# Altium PCB DAC_PCB.PcbDoc (part 2 of 2)
Units mil, origin at the board's own origin, x right, y up, seen from the top; angles counter-clockwise.
Board outline 5600 x 4000 mil, 4 copper layers (Top Layer, Plane(Gnd), Plane(Power), Bottom Layer), stack 23.756 mil thick; 217 components, 206 nets, 575 pads, 152 vias.
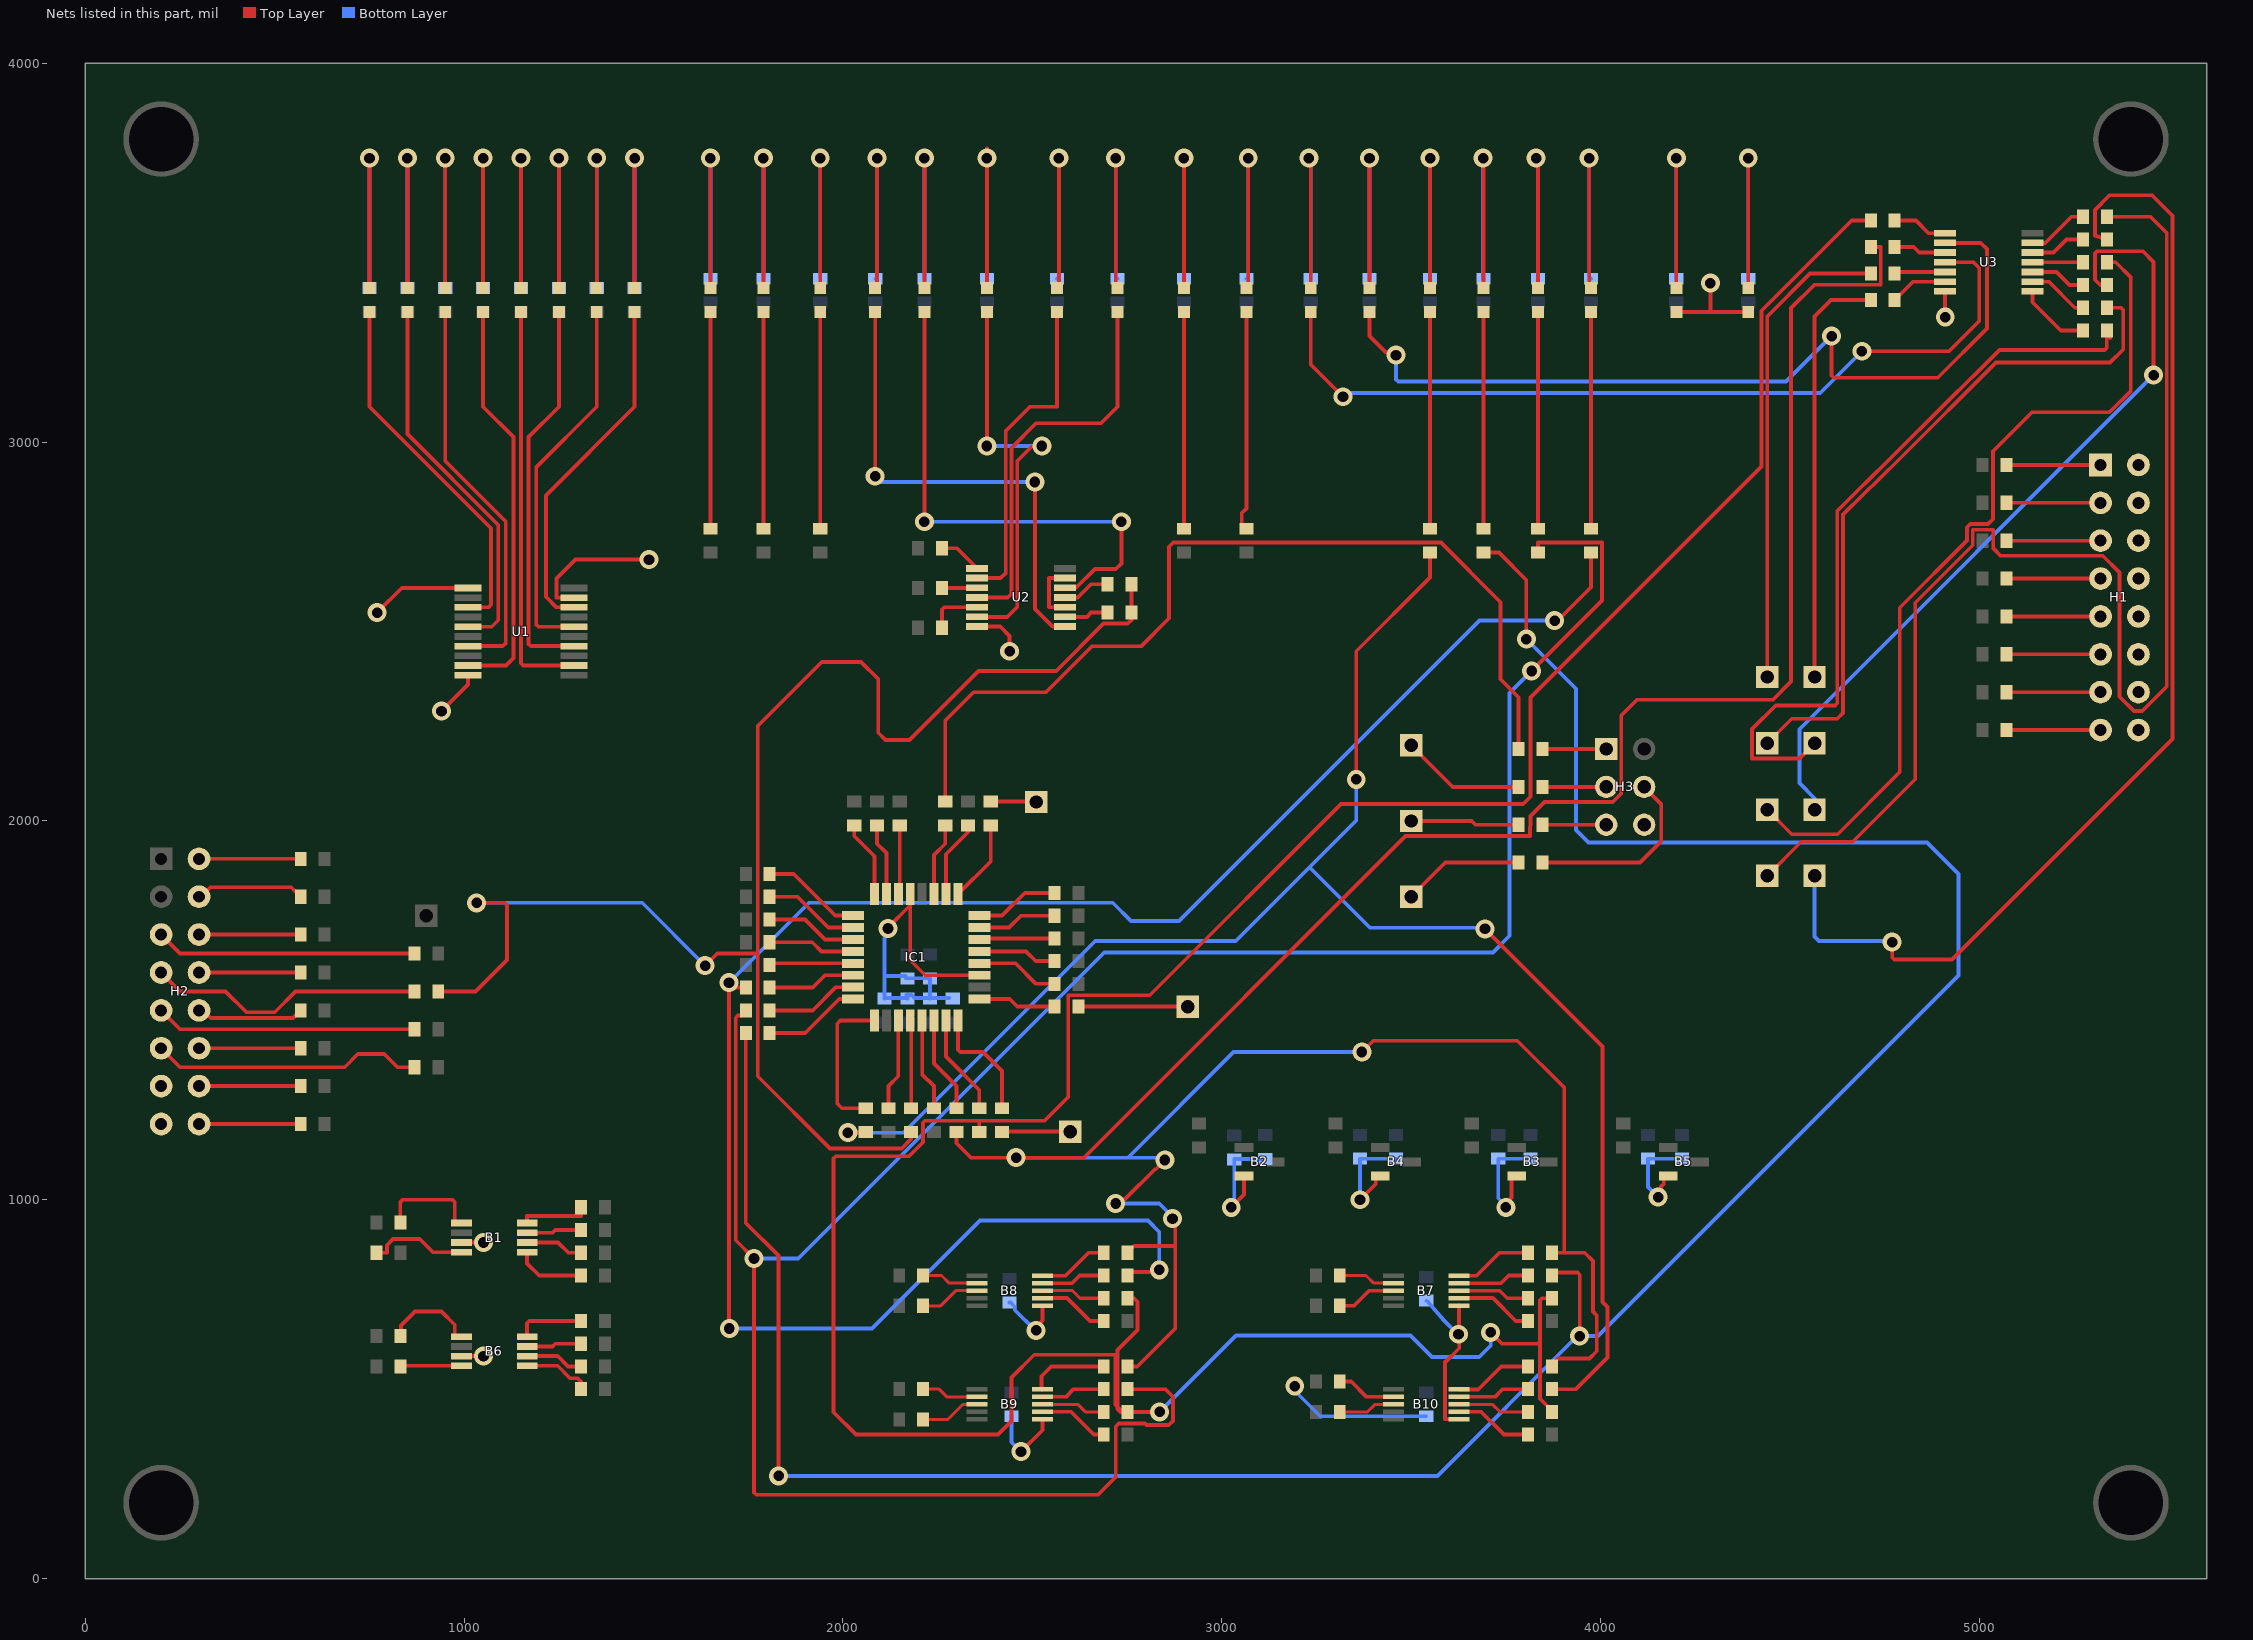
[diagram p4: the nets of this part, all layers, seen from the top]

## Via types
v1: diameter 50, hole 28, Top Layer to Bottom Layer, 152 vias

## Nets (pads, with @x,y where several pads share a name; then routed paths per layer and width w, separated by ;. In a path a pad name is that pad's centre, name@x,y a point inside that pad or via, vN(x,y) a via of type N, cw(c..) or ccw(c..) an arc to the next point about the centre after c; other vN are vias at no path point) (continued)
CPU_RnW: R69.1 R70.1 R108.2 R140.2 | length 4156
  Top Layer w10: R108.2@931.5,1550 1030,1550 1113,1633 1113,1778.14 1107.14,1784 v1(1033,1784) ; v1(1636,1618) 1668,1650 1775,1650 ; R140.2@2180,1178.5 2180,1160 2155,1135 1966,1135 1775,1326 1775,1650 ; R70.1@2761.5,2625 R69.1@2761.5,2550 2761.5,2530.5 2752,2521 2688,2521 2563,2396 2358,2396 2176,2214 2112,2214 2093,2233 2093,2375 2048,2420 1944,2420 1775,2251 1775,1650
  Bottom Layer w10: v1(1033,1784) 1470,1784 v1(1636,1618)
DAC_CS_0: R33.1 R95.1 R132.1 | length 5258.2
  Top Layer w10: v1(1700,660) 1699,661 v1(1699,1573) 1712,1560 R132.1@1743.5,1560 ; R33.1@2751.5,800 2760.7,809.21 2829.21,809.21 v1(2835,815) ; v1(3879,2529) 3887,2529 3975,2617 R95.1@3975,2708.5
  Bottom Layer w10: v1(1699,1573) 1910,1784 2712,1784 2760,1736 2887.21,1736 3680.21,2529 v1(3879,2529) ; v1(1700,660) 2077,660 2362,945 2805,945 2835,915 v1(2835,815)
DAC_CS_1: R43.1 R96.1 R134.1 | length 6454.5
  Top Layer w10: R134.1@1743.5,1500 1743.5,1497.05 1732.76,1486.3 1722.86,1486.3 1717,1480.44 1717,893 v1(1765,845) 1765,226.86 1770.86,221 2673,221 2720,268 2720,401 2728,409 2797,409 2801,405 2860,405 2871,416 2871,480 2851,500 R43.1@2751.5,500 ; v1(3818,2396) 4004,2582 4004,2735 3835,2735 R96.1@3835,2708.5
  Bottom Layer w10: v1(1765,845) 1882,845 2690,1653 3716,1653 3760,1697 3760,2338 v1(3818,2396)
DAC_CS_2: R34.1 R97.1 R136.1 | length 7292.1
  Top Layer w10: R136.1@1743.5,1440 1743.5,939 1830,852.5 v1(1830,271) ; R97.1@3691,2708.5 3732,2708.5 3804,2636.5 v1(3804,2480) ; R34.1@3871.5,800 3879.54,808.05 3939.14,808.05 3945,802.19 v1(3945,640)
  Bottom Layer w10: v1(1830,271) 3569.63,271 3938.63,640 3993,640 4945,1592 4945,1860 4862,1943 3968,1943 3935,1976 3935,2349 v1(3804,2480)
DAC_CS_3: R47.1 R98.1 R138.1 | length 4496.7
  Top Layer w10: v1(2013,1177) 2014.5,1178.5 R138.1@2060,1178.5 ; v1(3355,2110) 3355,2448 3550,2643 R98.1@3550,2708.5 ; v1(3695,1715) 4005,1405 4005,730 4018.33,716.67 4018.33,583.33 3935,500 R47.1@3871.5,500
  Bottom Layer w10: v1(2013,1177) 2160,1177 2666,1683 3037,1683 3232,1878 ; v1(3355,2110) 3355,2001 3232,1878 ; v1(3695,1715) 3691.72,1718.28 3391.72,1718.28 3232,1878
DAC_Din: R29.1 R31.1 R40.1 R44.1 R82.1 R135.2 | length 8119.6
  Top Layer w10: R135.2@2362.99,1189.25 2373.7,1189.25 R135.2@2360,1178.5 2360,1206.79 2358,1208.79 ; R29.1@2751.5,740 2768,740 2777.25,730.75 2777.25,656 2725,603.75 2725,453 ; v1(2836,440) R40.1@2751.5,440 R40.1@2738,440 ; v1(3710,650) 3740,620 3834.25,620 ; 3834.14,620 3840,625.86 ; R44.1@3871.5,440 3871.5,442.95 3840,474.45 3840,625.86 ; R31.1@3871.5,740 3845.86,740 3840,734.14 3840,625.86 ; R82.1@4713.5,3585 4663,3585 4425,3347 4425,2936 3815,2326 3815,2064 3796,2045 3315,2045 2810,1540 2595,1540 2595,1272 2531.79,1208.79 2358,1208.79 ; 2358,1208.79 2216.86,1208.79 2213.93,1205.86 2211,1202.93 2211,1152 2174,1115 1980.86,1115 1975,1109.14 1975,439 2034,380 2409,380 2445,416 2445,531 2505,591 2719,591 2719,459 2725,453 ; 2725,453 2725,448 2733,440 R40.1@2738,440 ; 2725,453 R40.1@2738,440
  Bottom Layer w10: v1(2836,440) 3038,642 3498,642 3555,585 3680,585 3710,615 v1(3710,650)
DAC_SCLK: R35.1 R36.1 R46.1 R48.1 R83.1 R137.2 | length 7898.4
  Top Layer w10: R137.2@2300,1178.5 2300,1149 2320,1129 2338,1111 2636,1111 3485,1960 3814,1960 3815,2013 3852,2050 4032,2050 4054.53,2072.53 4054.53,2278.53 4096,2320 4455,2320 4503,2368 4503,3354 4564.7,3415.7 4740,3415.7 4740,3515 R83.1@4713.5,3515 ; v1(2720,990) 2730.82,990 2742.51,1001.68 2744.89,1001.68 2823.8,1080.59 2825.59,1080.59 v1(2850,1105) ; R46.1@2751.5,560 2777,560 2877.03,660.03 2877.03,872.11 ; R35.1@2751.5,860 2751.5,862.95 2762.24,873.7 2765.2,873.7 2769.47,877.97 2871.17,877.97 2877.03,872.11 ; v1(2870,950) 2877.03,942.97 2877.03,872.11 ; v1(3370,1390) 3400,1420 3780,1420 3904,1296 3904,860 ; R48.1@3871.5,560 3882.24,570.75 3882.24,575.13 3888.1,580.99 3970.99,580.99 3990.14,600.14 3990.14,694.86 3980,705 3980,838.38 3958.38,860 3904,860 ; R36.1@3871.5,860 3904,860
  Bottom Layer w10: v1(2457,1111) 2752.28,1111 ; v1(2720,990) 2835,990 2870,955 v1(2870,950) ; v1(2850,1105) 2844,1111 2752.28,1111 ; v1(3370,1390) 3031.28,1390 2752.28,1111
GND: B1.3 B2.2 B3.2 B4.2 B5.2 B6.3 B7.6 B8.6 B9.6 B10.6 C1.1 C2.1 C3.1 C4.1 C5.1 C6.1 C7.1 C8.1 C9.1 C10.1 C11.1 C12.1 C13.2 C14.2 C15.2 C16.2 C17.2 C18.2 H1.2 H1.4 H1.6 H1.8 H1.10 H1.12 H1.14 H1.16 H2.13 H2.15 H3.6 IC1.19 IC1.29 LED16.1 LED17.1 U1.1 U1.10 U1.19 U2.7 U3.7 | length 4812
  Top Layer w10: v1(770,2550) 835.16,2615.16 U1.1@1010.24,2615.16 ; v1(940,2290) 1010.24,2360.24 U1.10@1010.24,2384.84 ; B6.3@993.39,587.2 v1(1050.95,587.2) ; B1.3@993.39,887.2 v1(1050.95,887.2) ; U1.19@1289.76,2589.57 1244,2589.57 1244,2640 1294,2690 v1(1488,2690) ; v1(2119,1716) 2119,1719 2177.57,1777.57 ; IC1.29@2177.57,1806.85 2177.57,1777.57 ; U2.7@2354.33,2513.23 2415.19,2513.23 2439.94,2488.48 v1(2439.94,2448) ; IC1.19@2360.17,1592.76 2217.24,1592.76 2177.57,1632.43 2177.57,1777.57 ; v1(2470,335) 2526.61,391.61 B9.6@2526.61,420.63 ; v1(2510,655) 2510,664.24 2526.61,680.86 B8.6@2526.61,720.63 ; v1(3025,980) 3058.66,1013.66 B2.2@3058.66,1062.6 ; v1(3365,1000) 3406.64,1041.64 3406.64,1055.79 3413.46,1062.6 B4.2@3418.66,1062.6 ; v1(3625,645) 3626.61,646.61 B7.6@3626.61,720.63 ; B10.6@3626.61,420.63 3589,420.63 3589,572 3591,572 3627,608 v1@3627,635 ; v1@3754,967 3754,994.82 3765,1005.82 3765,1055.79 3771.81,1062.6 B3.2@3778.66,1062.6 ; v1(4152,1007) 4159.65,1014.65 4159.65,1034.65 4166.64,1041.64 4166.64,1055.79 4173.46,1062.6 B5.2@4178.66,1062.6 ; LED17.1@4200,3343.5 4290,3343.5 ; v1(4290,3420) 4290,3343.5 ; LED16.1@4390,3343.5 4290,3343.5 ; U3.7@4909.33,3398.23 4909.33,3330.67 v1(4910,3330)
  Bottom Layer w10: C17.2@2110,1531.5 C17.2@2110,1532.99 ; v1(2119,1716) 2111.35,1708.35 2111.35,1691.49 2110,1690.14 2110,1595 ; C16.2@2165.61,1584.5 2165.61,1590.39 2114.61,1590.39 2110,1595 ; C18.2@2167.59,1540.27 2181.73,1540.27 2189.01,1532.99 C13.2@2230,1532.99 ; C18.2@2170,1531.5 2170,1532.99 C17.2@2110,1532.99 ; C16.2@2170,1584.5 C15.2@2230,1584.5 C13.2@2230,1532.99 ; C13.2@2230,1531.5 C13.2@2230,1532.99 ; C14.2@2280,1532.99 C13.2@2230,1532.99 ; C9.1@2440,728.5 2442.95,728.5 2453.7,717.76 2453.7,709.3 2508,655 v1(2510,655) ; C11.1@2445,428.5 2445,360 v1(2470,335) ; v1@3044,975 3030,975 v1(3025,980) 3025,990.82 3033,998.82 C1.1@3033,1106.5 3033,1107.5 C2.1@3115,1107.5 ; v1(3192.73,508) 3192.73,496 3260.23,428.5 C12.1@3540,428.5 ; v1(3365,1000) C5.1@3365,1108 ; C5.1@3365,1108.5 C5.1@3365,1108 ; C6.1@3460,1108.5 3412.5,1108 C5.1@3365,1108 ; C10.1@3540,733.5 3541.33,733.5 3586.77,681.26 ; 3586.99,681.01 3623,645 v1(3625,645) ; v1(3750,980) 3739,991 3739,995.13 3730,1004.13 C3.1@3730,1108.5 C4.1@3815,1108.5 ; v1(4152,1007) 4125,1034 C7.1@4125,1108.5 C8.1@4215,1108.5 ; C17.2@2110,1532.99 2110,1595
NetB1_1: B1.1 R3.2 | length 276.6
  Top Layer w10: R3.2@831.5,940 831.5,994.14 837.35,1000 969.14,1000 975,994.14 975,938.39 B1.1@993.39,938.39
NetB1_4: B1.4 R7.1 | length 266
  Top Layer w10: R7.1@768.5,860 796.06,860 796.06,880 812.36,896.3 882.7,896.3 917.39,861.61 B1.4@993.39,861.61
NetB1_5: B1.5 R5.1 | length 186
  Top Layer w10: B1.5@1166.61,861.61 1166,861.61 1166,832 1198,800 R5.1@1308.5,800
NetB1_6: B1.6 R4.2 | length 153.2
  Top Layer w10: B1.6@1166.61,887.2 1247.8,887.2 1275,860 R4.2@1308.5,860
NetB1_7: B1.7 R6.2 | length 144.9
  Top Layer w10: B1.7@1166.61,912.8 1233,912.8 1240.2,920 R6.2@1308.5,920
NetB1_8: B1.8 R8.2 | length 184.7
  Top Layer w10: B1.8@1166.61,938.39 1166,938.39 1166,957 1308.5,957 R8.2@1308.5,980
NetB6_1: B6.1 R11.2 | length 248.2
  Top Layer w10: R11.2@831.5,640 832.84,641.35 832.84,667.84 870,705 940,705 975,670 975,642.24 978.86,638.39 B6.1@993.39,638.39
NetB6_4: B6.4 R15.1 | length 162.6
  Top Layer w10: R15.1@831.5,560 833.11,561.61 B6.4@993.39,561.61
NetB6_5: B6.5 R13.1 | length 179.1
  Top Layer w10: B6.5@1166.61,561.61 1247,561.61 1279.61,529 1299.5,529 1308.5,520 R13.1@1308.5,500
NetB6_6: B6.6 R12.2 | length 153.2
  Top Layer w10: B6.6@1166.61,587.2 1246.8,587.2 1274,560 R12.2@1308.5,560
NetB6_7: B6.7 R14.2 | length 144.9
  Top Layer w10: B6.7@1166.61,612.8 1233,612.8 1240.2,620 R14.2@1308.5,620
NetB6_8: B6.8 R16.2 | length 180.9
  Top Layer w10: B6.8@1166.61,638.39 1166.61,641.63 1166,642.24 1166,674.14 1171.86,680 R16.2@1308.5,680
NetB7_2: B7.2 R28.1 | length 150.3
  Top Layer w8: R28.1@3311.5,800 3381,800 3401.32,779.69 B7.2@3453.39,779.69
NetB7_3: B7.3 R32.1 | length 158.5
  Top Layer w10: R32.1@3311.5,720 3349,720 3389,760 B7.3@3453.39,760
NetB7_7: B7.7 R22.2 | length 206.9
  Top Layer w10: B7.7@3626.61,740.32 3715.68,740.32 3776,680 R22.2@3808.5,680
NetB7_8: B7.8 R31.2 | length 190.2
  Top Layer w10: B7.8@3626.61,760 3733.69,760 3753.69,740 R31.2@3808.5,740
NetB7_9: B7.9 R34.2 | length 190.3
  Top Layer w10: B7.9@3626.61,779.69 3737.32,779.69 3757.63,800 R34.2@3808.5,800
NetB7_10: B7.10 R36.2 | length 207
  Top Layer w10: B7.10@3626.61,799.37 3672.37,799.37 3733,860 R36.2@3808.5,860
NetB8_2: B8.2 R27.1 | length 150.3
  Top Layer w8: R27.1@2211.5,800 2260,800 2280.32,779.69 B8.2@2353.39,779.69
NetB8_3: B8.3 R30.1 | length 160.4
  Top Layer w8: R30.1@2209.52,720 2258,720 2298,760 B8.3@2353.39,760
NetB8_7: B8.7 R21.2 | length 186.9
  Top Layer w10: B8.7@2526.61,740.32 2591.68,740.32 2652,680 R21.2@2688.5,680
NetB8_8: B8.8 R29.2 | length 170.2
  Top Layer w8: B8.8@2526.61,760 2606,760 2626,740 R29.2@2688.5,740
NetB8_9: B8.9 R33.2 | length 170.3
  Top Layer w10: B8.9@2526.61,779.69 2604.69,779.69 2625,800 R33.2@2688.5,800
NetB8_10: B8.10 R35.2 | length 187
  Top Layer w10: B8.10@2526.61,799.37 2587.37,799.37 2648,860 R35.2@2688.5,860
NetB9_2: B9.2 R39.1 | length 150.3
  Top Layer w8: R39.1@2211.5,500 2254,500 2274.32,479.69 B9.2@2353.39,479.69
NetB9_3: B9.3 R41.1 | length 158.5
  Top Layer w8: R41.1@2211.5,420 2277,420 2317,460 B9.3@2353.39,460
NetB9_7: B9.7 R37.2 | length 186.9
  Top Layer w10: B9.7@2526.61,440.32 2601.68,440.32 2662,380 R37.2@2688.5,380
NetB9_8: B9.8 R40.2 | length 170.2
  Top Layer w8: B9.8@2526.61,460 2620,460 2640,440 R40.2@2688.5,440
NetB9_9: B9.9 R43.2 | length 170.3
  Top Layer w10: B9.9@2526.61,479.69 2588.69,479.69 2609,500 R43.2@2688.5,500
NetB9_10: B9.10 R46.2 | length 212.5
  Top Layer w10: B9.10@2526.61,499.37 2524,499.37 2524,534 2550,560 R46.2@2688.5,560
NetB10_2: B10.2 R42.1 | length 158.6
  Top Layer w10: R42.1@3311.5,520 3342,520 3382.31,479.69 B10.2@3453.39,479.69
NetB10_3: B10.3 R45.1 | length 150.2
  Top Layer w8: R45.1@3311.5,440 3385,440 3405,460 B10.3@3453.39,460
NetB10_7: B10.7 R38.2 | length 206.9
  Top Layer w10: B10.7@3626.61,440.32 3684.68,440.32 3745,380 R38.2@3808.5,380
NetB10_8: B10.8 R44.2 | length 190.2
  Top Layer w8: B10.8@3626.61,460 3714.39,460 3734.39,440 R44.2@3808.5,440
NetB10_9: B10.9 R47.2 | length 190.3
  Top Layer w10: B10.9@3626.61,479.69 3721.69,479.69 3742,500 R47.2@3808.5,500
NetB10_10: B10.10 R48.2 | length 207
  Top Layer w10: B10.10@3626.61,499.37 3677.37,499.37 3738,560 R48.2@3808.5,560
NetH1_1: H1.1 R17.2 | length 248.5
  Top Layer w10: R17.2@5071.5,2940 H1.1@5320,2940
NetH1_3: H1.3 R18.2 | length 248.5
  Top Layer w10: R18.2@5071.5,2840 H1.3@5320,2840
NetH1_5: H1.5 R19.2 | length 248.5
  Top Layer w10: R19.2@5071.5,2740 H1.5@5320,2740
NetH1_7: H1.7 R20.2 | length 248.5
  Top Layer w10: R20.2@5071.5,2640 H1.7@5320,2640
NetH1_9: H1.9 R23.2 | length 248.5
  Top Layer w10: R23.2@5071.5,2540 H1.9@5320,2540
NetH1_11: H1.11 R24.2 | length 248.5
  Top Layer w10: R24.2@5071.5,2440 H1.11@5320,2440
NetH1_13: H1.13 R25.2 | length 248.5
  Top Layer w10: R25.2@5071.5,2340 H1.13@5320,2340
NetH1_15: H1.15 R26.2 | length 248.5
  Top Layer w10: R26.2@5071.5,2240 H1.15@5320,2240
NetH2_2: H2.2 R99.2 | length 268.5
  Top Layer w10: H2.2@300,1900 R99.2@568.5,1900
NetH2_4: H2.4 R101.2 | length 290.9
  Top Layer w10: H2.4@300,1800 305.36,1800 330.36,1825 543.5,1825 554.8,1813.7 557.76,1813.7 568.5,1802.95 R101.2@568.5,1800
NetH2_5: H2.5 R105.1 | length 689.2
  Top Layer w10: H2.5@200,1700 250,1650 R105.1@868.5,1650
NetH2_6: H2.6 R104.2 | length 268.5
  Top Layer w10: H2.6@300,1700 R104.2@568.5,1700
NetH2_7: H2.7 R108.1 | length 734.8
  Top Layer w10: H2.7@200,1600 250,1550 370,1550 425,1495 500,1495 555,1550 R108.1@868.5,1550
NetH2_8: H2.8 R107.2 | length 268.5
  Top Layer w10: H2.8@300,1600 R107.2@568.5,1600
NetH2_9: H2.9 R110.1 | length 689.2
  Top Layer w10: H2.9@200,1500 250,1450 R110.1@868.5,1450
NetH2_10: H2.10 R109.2 | length 286.8
  Top Layer w10: H2.10@300,1500 310.86,1500 330.86,1480 548.5,1480 554.8,1486.3 557.76,1486.3 568.5,1497.05 R109.2@568.5,1500
NetH2_11: H2.11 R112.1 | length 717.8
  Top Layer w10: H2.11@200,1400 250,1350 684.51,1350 719,1384.49 789.09,1384.49 823.58,1350 R112.1@868.5,1350
NetH2_12: H2.12 R111.2 | length 268.5
  Top Layer w10: H2.12@300,1400 R111.2@568.5,1400
NetH2_14: H2.14 R113.2 | length 268.5
  Top Layer w10: H2.14@300,1300 R113.2@568.5,1300
NetH2_16: H2.16 R114.2 | length 268.5
  Top Layer w10: H2.16@300,1200 R114.2@568.5,1200
NetH3_1: H3.1 R100.2 | length 168.5
  Top Layer w10: R100.2@3846.5,2190 H3.1@4015,2190
NetH3_3: H3.3 R102.2 | length 168.5
  Top Layer w10: R102.2@3846.5,2090 H3.3@4015,2090
NetH3_4: H3.4 R103.1 | length 499.2
  Top Layer w10: R103.1@3846.5,1890 4103.79,1890 4160,1946.21 4160,2045 H3.4@4115,2090
NetH3_5: H3.5 R106.2 | length 168.5
  Top Layer w10: R106.2@3846.5,1990 H3.5@4015,1990
NetIC1_1: IC1.1 R121.2 | length 265.4
  Top Layer w10: R121.2@1806.5,1860 1870,1860 1979.76,1750.24 IC1.1@2026.47,1750.24
NetIC1_2: IC1.2 R123.2 | length 253.6
  Top Layer w10: R123.2@1806.5,1800 1880,1800 1961.26,1718.74 IC1.2@2026.47,1718.74
NetIC1_3: IC1.3 R125.2 | length 241.8
  Top Layer w10: R125.2@1806.5,1740 1900,1740 1952.76,1687.24 IC1.3@2026.47,1687.24
NetIC1_4: IC1.4 R127.2 | length 230
  Top Layer w10: R127.2@1806.5,1680 1919,1680 1943.25,1655.75 IC1.4@2026.47,1655.75
NetIC1_5: IC1.5 R129.2 | length 221.7
  Top Layer w10: R129.2@1806.5,1620 1810.75,1624.25 IC1.5@2026.47,1624.25
NetIC1_6: IC1.6 R132.2 | length 233.5
  Top Layer w10: R132.2@1806.5,1560 1920,1560 1952.76,1592.76 IC1.6@2026.47,1592.76
NetIC1_7: IC1.7 R134.2 | length 245.3
  Top Layer w10: R134.2@1806.5,1500 1920,1500 1981.26,1561.26 IC1.7@2026.47,1561.26
NetIC1_8: IC1.8 R136.2 | length 257.2
  Top Layer w10: R136.2@1806.5,1440 1900.34,1440 1990.1,1529.76 IC1.8@2026.47,1529.76
NetIC1_9: IC1.9 R138.2 | length 393.1
  Top Layer w10: R138.2@2060,1241.5 1997.01,1241.5 1984.75,1253.76 1984.75,1464.75 1993.15,1473.15 IC1.9@2083.08,1473.15
NetIC1_11: IC1.11 R141.1 | length 242.5
  Top Layer w10: R141.1@2120,1241.5 2120,1300 2146.07,1326.07 IC1.11@2146.07,1473.15
NetIC1_12: IC1.12 R140.1 | length 232.7
  Top Layer w10: IC1.12@2177.57,1473.15 2180,1470.72 R140.1@2180,1241.5
NetIC1_13: IC1.13 R139.1 | length 244.5
  Top Layer w10: IC1.13@2209.06,1473.15 2209.06,1330.94 2240,1300 R139.1@2240,1241.5
NetIC1_14: IC1.14 R137.1 | length 256.3
  Top Layer w10: IC1.14@2240.56,1473.15 2240.56,1359.44 2300,1300 R137.1@2300,1241.5
NetIC1_15: IC1.15 R135.1 | length 268.1
  Top Layer w10: IC1.15@2272.06,1473.15 2272.06,1377.94 2360,1290 R135.1@2360,1241.5
NetIC1_16: IC1.16 R133.1 | length 315.4
  Top Layer w10: IC1.16@2303.55,1473.15 2303.55,1395.86 2309.41,1390 2370,1390 2420,1340 R133.1@2420,1241.5
NetIC1_17: IC1.17 R131.1 | length 206.5
  Top Layer w10: IC1.17@2360.17,1529.76 2440.24,1529.76 2460,1510 R131.1@2558.5,1510
NetIC1_20: IC1.20 R130.1 | length 220.8
  Top Layer w10: IC1.20@2360.17,1624.25 2455.75,1624.25 2510,1570 R130.1@2558.5,1570
NetIC1_21: IC1.21 R128.1 | length 209
  Top Layer w10: IC1.21@2360.17,1655.75 2483.13,1655.75 2508.88,1630 R128.1@2558.5,1630
NetIC1_22: IC1.22 R126.1 | length 199.5
  Top Layer w10: IC1.22@2360.17,1687.24 2362.92,1690 R126.1@2558.5,1690
NetIC1_23: IC1.23 R124.1 | length 211.3
  Top Layer w10: IC1.23@2360.17,1718.74 2438.74,1718.74 2470,1750 R124.1@2558.5,1750
NetIC1_24: IC1.24 R122.1 | length 223.1
  Top Layer w10: IC1.24@2360.17,1750.24 2420.24,1750.24 2480,1810 R122.1@2558.5,1810
NetIC1_25: IC1.25 R120.1 | length 217.5
  Top Layer w10: IC1.25@2303.55,1806.85 2390,1893.3 R120.1@2390,1988.5
NetIC1_26: IC1.26 R118.1 | length 205.7
  Top Layer w10: IC1.26@2272.06,1806.85 2272.06,1912.06 2330,1970 R118.1@2330,1988.5
NetIC1_27: IC1.27 R116.1 | length 193.8
  Top Layer w10: IC1.27@2240.56,1806.85 2240.56,1910.56 2270,1940 R116.1@2270,1988.5
NetIC1_30: IC1.30 R115.2 | length 183.3
  Top Layer w10: IC1.30@2146.07,1806.85 2150,1810.78 R115.2@2150,1988.5
NetIC1_31: IC1.31 R117.2 | length 191.8
  Top Layer w10: R117.2@2090,1988.5 2090,1940 2114.58,1915.42 IC1.31@2114.58,1806.85
NetIC1_32: IC1.32 R119.2 | length 203.6
  Top Layer w10: R119.2@2030,1988.5 2030,1960 2083.08,1906.92 IC1.32@2083.08,1806.85
NetLED1_1: LED1.1 U2.2 | length 867.7
  Top Layer w10: U2.2@2354.33,2641.18 2416.18,2641.18 2430,2655 2430,3030 2493.5,3093.5 2565,3093.5 LED1.1@2565,3343.5
NetLED1_2: LED1.2 R49.1 | length 671.2
  Top Layer w10: LED1.2@2565,3406.5 2570,3411.5 v1@2570,3755
  Bottom Layer w10: R49.1@2565,3431.5 R49.1@2570,3436.5 ; R49.1@2570,3441.5 v1@2570,3755
  other v1: 2570,3750
NetLED2_1: LED2.1 U2.4 | length 1054.8
  Top Layer w10: U2.4@2354.33,2590 2435,2590 2445,2600 2445,2985 2510,3050 2681.5,3050 2725,3093.5 LED2.1@2725,3343.5
NetLED2_2: LED2.2 R50.1 | length 673.2
  Top Layer w10: v1(2720,3750) 2720,3411.5 LED2.2@2725,3406.5 ; v1@2720,3755 v1@2725,3750
  Bottom Layer w10: R50.1@2720,3436.5 R50.1@2725,3431.5 ; R50.1@2720,3441.5 v1@2720,3755
NetLED3_1: LED3.1 U2.6 | length 1080.6
  Top Layer w10: U2.6@2354.33,2538.82 2433.82,2538.82 2460,2565 2460,2950 2497.25,2987.25 v1(2525,2990) ; v1(2380,2990) LED3.1@2380,3343.5
  Bottom Layer w10: v1(2380,2990) v1(2525,2990)
NetLED3_2: LED3.2 R51.1 | length 677
  Top Layer w10: LED3.2@2380,3411.5 v1(2380,3750) 2380,3775
  Bottom Layer w10: R51.1@2380,3436.5 v1(2380,3750)
NetLED4_1: LED4.1 U2.8 | length 1294.8
  Top Layer w10: v1(2085,2910) LED4.1@2085,3343.5 ; v1(2506.77,2895) 2506.77,2560 2553.54,2513.23 U2.8@2585.67,2513.23
  Bottom Layer w10: v1(2085,2910) 2100,2895 v1(2506.77,2895)
NetLED4_2: LED4.2 R52.1 | length 666.2
  Top Layer w10: LED4.2@2085,3406.5 LED4.2@2090,3411.5 ; LED4.2@2090,3416.5 v1@2090,3755
  Bottom Layer w10: R52.1@2085,3431.5 R52.1@2090,3436.5 ; R52.1@2090,3441.5 v1@2090,3755
  other v1: 2090,3750
NetLED5_1: LED5.1 R71.2 | length 589
  Top Layer w10: R71.2@3065,2771.5 3052.95,2771.5 3052.95,2812.72 3065,2824.77 LED5.1@3065,3343.5
NetLED5_2: LED5.2 R54.1 | length 671.2
  Top Layer w10: LED5.2@3065,3406.5 3070,3411.5 v1@3070,3755
  Bottom Layer w10: R54.1@3065,3431.5 R54.1@3070,3436.5 ; R54.1@3070,3441.5 v1@3070,3755
  other v1: 3070,3750
NetLED6_1: LED6.1 R72.2 | length 572
  Top Layer w10: R72.2@2900,2771.5 LED6.1@2900,3343.5
NetLED6_2: LED6.2 R55.1 | length 662
  Top Layer w10: LED6.2@2900,3411.5 v1@2900,3755
  Bottom Layer w10: R55.1@2900,3436.5 v1@2900,3755
  other v1: 2900,3750
NetLED7_1: LED7.1 U1.18 | length 933.8
  Top Layer w10: U1.18@1289.76,2563.98 1244.05,2563.98 1216.02,2592 1216.02,2859.53 1450,3093.5 LED7.1@1450,3343.5
NetLED7_2: LED7.2 R58.1 | length 687
  Top Layer w10: LED7.2@1450,3406.5 v1(1450,3750)
  Bottom Layer w10: R58.1@1450,3406.5 v1(1450,3750)
NetLED8_1: LED8.1 U1.16 | length 993.3
  Top Layer w10: U1.16@1289.76,2512.8 1195.86,2512.8 1190,2518.65 1190,2933.5 1350,3093.5 LED8.1@1350,3343.5
NetLED8_2: LED8.2 R59.1 | length 687
  Top Layer w10: LED8.2@1350,3406.5 v1(1350,3750)
  Bottom Layer w10: R59.1@1350,3406.5 v1(1350,3750)
NetLED9_1: LED9.1 U1.14 | length 1031.4
  Top Layer w10: LED9.1@1250,3343.5 1250,3093.5 1170,3013.5 1170,2467.47 1175.86,2461.61 U1.14@1289.76,2461.61
NetLED9_2: LED9.2 R60.1 | length 687
  Top Layer w10: LED9.2@1250,3406.5 v1(1250,3750)
  Bottom Layer w10: R60.1@1250,3406.5 v1(1250,3750)
NetLED10_1: LED10.1 U1.12 | length 1069.4
  Top Layer w10: LED10.1@1150,3343.5 1150,2416.29 1155.86,2410.43 U1.12@1289.76,2410.43
NetLED10_2: LED10.2 R61.1 | length 687
  Top Layer w10: LED10.2@1150,3406.5 v1(1150,3750)
  Bottom Layer w10: R61.1@1150,3406.5 v1(1150,3750)
NetLED11_1: LED11.1 U1.9 | length 1074.5
  Top Layer w10: U1.9@1010.24,2410.43 1110.43,2410.43 1130,2430 1130,3013.5 1050,3093.5 LED11.1@1050,3343.5
NetLED11_2: LED11.2 R62.1 | length 687
  Top Layer w10: LED11.2@1050,3406.5 v1(1050,3750)
  Bottom Layer w10: R62.1@1050,3406.5 v1(1050,3750)
NetLED12_1: LED12.1 U1.7 | length 1043
  Top Layer w10: LED12.1@950,3343.5 950,2950.07 1110,2790.07 1110,2470 1101.61,2461.61 U1.7@1010.24,2461.61
NetLED12_2: LED12.2 R63.1 | length 687
  Top Layer w10: LED12.2@950,3406.5 v1(950,3750)
  Bottom Layer w10: R63.1@950,3406.5 v1(950,3750)
NetLED13_1: LED13.1 U1.5 | length 999.8
  Top Layer w10: LED13.1@850,3343.5 850,3021.79 1090,2781.79 1090,2530 1072.8,2512.8 U1.5@1010.24,2512.8
NetLED13_2: LED13.2 R64.1 | length 687
  Top Layer w10: LED13.2@850,3406.5 v1(850,3750)
  Bottom Layer w10: R64.1@850,3406.5 v1(850,3750)
NetLED14_1: LED14.1 U1.3 | length 968.9
  Top Layer w10: LED14.1@750,3343.5 750,3093.5 1070.67,2772.83 1070.67,2570.67 1063.98,2563.98 U1.3@1010.24,2563.98
NetLED14_2: LED14.2 R65.1 | length 687
  Top Layer w10: LED14.2@750,3406.5 v1(750,3750)
  Bottom Layer w10: R65.1@750,3406.5 v1(750,3750)
NetLED15_1: LED15.1 U2.12 | length 1359.5
  Top Layer w10: v1(2215,2790) LED15.1@2215,3343.5 ; U2.12@2585.67,2615.59 2615.59,2615.59 2665,2665 2720,2665 2735,2680 v1(2735,2790)
  Bottom Layer w10: v1(2215,2790) v1(2735,2790)
NetLED15_2: LED15.2 R53.1 | length 666.2
  Top Layer w10: v1@2210,3755 v1(2215,3750) ; LED15.2@2215,3406.5 v1@2215,3745
  Bottom Layer w10: v1@2210,3755 v1(2215,3750) ; R53.1@2215,3431.5 v1@2215,3745
NetLED16_2: LED16.2 R56.1 | length 662
  Top Layer w10: LED16.2@4390,3406.5 v1(4390,3750)
  Bottom Layer w10: R56.1@4390,3431.5 v1(4390,3750)
NetLED17_2: LED17.2 R57.2 | length 662
  Top Layer w10: LED17.2@4200,3406.5 v1(4200,3750)
  Bottom Layer w10: R57.2@4200,3431.5 v1(4200,3750)
NetLED18_1: LED18.1 U3.2 | length 2318.3
  Top Layer w10: LED18.1@3390,3343.5 3390,3280 3432.35,3237.65 3452.35,3237.65 v1(3460,3230) ; v1(4610,3280) 4610,3175.86 4615.86,3170 4890,3170 5020,3300 5020,3510 5003.82,3526.18 U3.2@4909.33,3526.18
  Bottom Layer w10: v1(3460,3230) 3460,3165.86 3465.86,3160 4490,3160 v1(4610,3280)
NetLED18_2: LED18.2 R73.1 | length 682
  Top Layer w10: LED18.2@3390,3411.5 v1@3390,3765
  Bottom Layer w10: R73.1@3390,3436.5 v1@3390,3765
  other v1: 3390,3750
NetLED19_1: LED19.1 U3.4 | length 2260.9
  Top Layer w10: LED19.1@3235,3343.5 3235,3205 v1(3320,3120) ; v1(4690,3240) 4920,3240 5000,3320 5000,3460 4985,3475 U3.4@4909.33,3475
  Bottom Layer w10: v1(3320,3120) 3320,3124.14 3325.86,3130 4580,3130 v1(4690,3240)
NetLED19_2: LED19.2 R74.1 | length 676.2
  Top Layer w10: v1(3230,3750) 3235,3745 LED19.2@3235,3406.5
  Bottom Layer w10: v1@3230,3765 3230,3755 v1@3235,3750 ; R74.1@3235,3431.5 v1@3235,3745
NetLED20_1: LED20.1 R95.2 | length 572
  Top Layer w10: R95.2@3975,2771.5 LED20.1@3975,3343.5
NetLED20_2: LED20.2 R75.1 | length 666.2
  Top Layer w10: v1(3970,3750) 3970,3411.5 LED20.2@3975,3406.5
  Bottom Layer w10: v1(3970,3750) 3970,3436.5 R75.1@3975,3431.5
NetLED21_1: LED21.1 R96.2 | length 572
  Top Layer w10: R96.2@3835,2771.5 LED21.1@3835,3343.5
NetLED21_2: LED21.2 R76.1 | length 666.2
  Top Layer w10: v1(3830,3750) 3835,3745 LED21.2@3835,3406.5
  Bottom Layer w10: v1(3830,3750) 3835,3745 R76.1@3835,3431.5
NetLED22_1: LED22.1 R97.2 | length 572
  Top Layer w10: R97.2@3691,2771.5 LED22.1@3691,3343.5
NetLED22_2: LED22.2 R77.1 | length 662.8
  Top Layer w10: v1(3690,3750) 3691,3749 LED22.2@3691,3406.5
  Bottom Layer w10: v1(3690,3750) 3690,3432.5 R77.1@3691,3431.5
NetLED23_1: LED23.1 R98.2 | length 572
  Top Layer w10: R98.2@3550,2771.5 LED23.1@3550,3343.5
NetLED23_2: LED23.2 R78.1 | length 662
  Top Layer w10: LED23.2@3550,3406.5 v1(3550,3750)
  Bottom Layer w10: R78.1@3550,3431.5 v1(3550,3750)
NetLED24_1: LED24.1 R92.2 | length 572
  Top Layer w10: R92.2@1940,2771.5 LED24.1@1940,3343.5
NetLED24_2: LED24.2 R79.1 | length 662
  Top Layer w10: LED24.2@1940,3411.5 v1@1940,3755
  Bottom Layer w10: R79.1@1940,3436.5 v1@1940,3755
  other v1: 1940,3750
NetLED25_1: LED25.1 R93.2 | length 572
  Top Layer w10: R93.2@1790,2771.5 LED25.1@1790,3343.5
NetLED25_2: LED25.2 R80.2 | length 662
  Top Layer w10: LED25.2@1790,3406.5 v1(1790,3750)
  Bottom Layer w10: R80.2@1790,3431.5 v1(1790,3750)
NetLED26_1: LED26.1 R94.2 | length 572
  Top Layer w10: R94.2@1650,2771.5 LED26.1@1650,3343.5
NetLED26_2: LED26.2 R81.1 | length 662
  Top Layer w10: LED26.2@1650,3406.5 v1(1650,3750)
  Bottom Layer w10: R81.1@1650,3431.5 v1(1650,3750)
NetR66_2: R66.2 U2.1 | length 114.9
  Top Layer w10: R66.2@2261.5,2720 2301.1,2720 U2.1@2354.33,2666.77
NetR67_2: R67.2 U2.3 | length 93.1
  Top Layer w10: R67.2@2261.5,2615 2353.74,2615 U2.3@2354.33,2615.59
NetR68_2: R68.2 U2.5 | length 143.8
  Top Layer w10: R68.2@2261.5,2510 2261.5,2558.55 2267.35,2564.41 U2.5@2354.33,2564.41
NetR69_2: R69.2 U2.9 | length 117.5
  Top Layer w10: U2.9@2585.67,2538.82 2643.82,2538.82 2655,2550 R69.2@2698.5,2550
NetR70_2: R70.2 U2.11 | length 127.3
  Top Layer w10: U2.11@2585.67,2590 2620,2590 2655,2625 R70.2@2698.5,2625
NetR82_2: R82.2 U3.1 | length 146.6
  Top Layer w10: R82.2@4776.5,3585 4833,3585 4866.23,3551.77 U3.1@4909.33,3551.77
NetR83_2: R83.2 U3.3 | length 138.8
  Top Layer w10: R83.2@4776.5,3515 4827,3515 4841.41,3500.59 U3.3@4909.33,3500.59
NetR84_1: R84.1 TP1.1 | length 1272.3
  Top Layer w10: TP1.1@4440,2380 4440,3332 4553,3445 R84.1@4713.5,3445
NetR84_2: R84.2 U3.5 | length 134.7
  Top Layer w10: R84.2@4776.5,3445 4780.91,3449.41 U3.5@4909.33,3449.41
NetR85_1: R85.1 U3.6 | length 153.1
  Top Layer w10: R85.1@4776.5,3375 4825.31,3423.82 U3.6@4909.33,3423.82
NetR85_2: R85.2 TP2.1 | length 1118.3
  Top Layer w10: TP2.1@4565,2380 4565,3332 4608,3375 R85.2@4713.5,3375
NetR86_1: R86.1 TP3.1 | length 1826.9
  Top Layer w10: TP3.1@4440,2205 4505,2270 4625,2270 4640,2285 4640,2808.73 4642.99,2811.72 4788.79,2955 5043.79,3210 5345,3210 5380,3245 5380,3349.14 5374.14,3355 R86.1@5336.5,3355
NetR86_2: R86.2 U3.9 | length 161.3
  Top Layer w10: U3.9@5140.67,3423.82 5183.18,3423.82 5252,3355 R86.2@5273.5,3355
NetR87_1: R87.1 U3.8 | length 192.5
  Top Layer w10: U3.8@5140.67,3398.23 5140.67,3369.33 5215,3295 R87.1@5273.5,3295
NetR87_2: R87.2 TP4.1 | length 1977.6
  Top Layer w10: TP4.1@4565,2205 4525,2165 4400,2165 4400,2242.47 4462.53,2305 4619.14,2305 4625,2310.86 4625,2818.01 5052.99,3242.99 5330.64,3242.99 5336.5,3248.85 R87.2@5336.5,3295 5344.37,3280.76 5345.62,3278.5 5345.62,3274.51
NetR88_1: R88.1 TP5.1 | length 2231.2
  Top Layer w10: TP5.1@4440,2030 4505,1965 4626,1965 4790,2129 4790,2563 4967.75,2740.75 4967.75,2775.46 4976,2783.7 5023,2783.7 5036,2796.7 5036,2976 5139,3079 5344,3079 5400,3135 5400,3435 5360,3475 R88.1@5336.5,3475
NetR88_2: R88.2 U3.11 | length 132.8
  Top Layer w10: U3.11@5140.67,3475 R88.2@5273.5,3475
NetR89_1: R89.1 U3.10 | length 147.1
  Top Layer w10: U3.10@5140.67,3449.41 5203.59,3449.41 5238,3415 R89.1@5273.5,3415
NetR89_2: R89.2 TP6.1 | length 2125.3
  Top Layer w10: R89.2@5336.5,3415 5319,3415 5305,3429 5305,3498.14 5310.86,3504 5432,3504 5460,3476 v1(5460,3177)
  Bottom Layer w10: TP6.1@4565,2030 4565,2060 4525,2100 4525,2242 v1(5460,3177)
NetR90_1: R90.1 TP7.1 | length 3550.2
  Top Layer w10: TP7.1@4440,1855 4530,1945 4666,1945 4831,2110 4831,2576 4982.75,2727.75 4982.75,2768.7 5037,2768.7 5037,2719 5056,2700 5326,2700 5370,2656 5370,2328 5408,2290 5430,2290 5495,2355 5495,3552 5452,3595 R90.1@5336.5,3595
NetR90_2: R90.2 U3.13 | length 161.3
  Top Layer w10: U3.13@5140.67,3526.18 5174.19,3526.18 5243,3595 R90.2@5273.5,3595
NetR91_1: R91.1 U3.12 | length 147.1
  Top Layer w10: U3.12@5140.67,3500.59 5195.59,3500.59 5230,3535 R91.1@5273.5,3535
NetR91_2: R91.2 TP8.1 | length 3120.9
  Top Layer w10: v1(4770,1680) 4770,1639.86 4775.86,1634 4928,1634 5510,2216 5510,3598 5456,3652 5344,3652 5305,3613 5305,3545.7 R91.2@5336.5,3535
  Bottom Layer w10: TP8.1@4565,1855 4565,1695 4576.72,1683.28 4766.72,1683.28 v1(4770,1680)
NetR102_1: R102.1 TP10.1 | length 329.1
  Top Layer w10: TP10.1@3500,2200 3610,2090 R102.1@3783.5,2090
NetR103_2: R103.2 TP11.1 | length 320.8
  Top Layer w10: TP11.1@3500,1800 3590,1890 R103.2@3783.5,1890
NetR106_1: R106.1 TP12.1 | length 287.6
  Top Layer w10: TP12.1@3500,2000 3660,2000 3670,1990 R106.1@3783.5,1990
NetR120_2: R120.2 TP13.1 | length 120.6
  Top Layer w10: R120.2@2390,2051.5 2508.5,2051.5 TP13.1@2510,2050
NetR131_2: R131.2 TP14.1 | length 288.5
  Top Layer w10: R131.2@2621.5,1510 TP14.1@2910,1510
NetR133_2: R133.2 TP15.1 | length 180.6
  Top Layer w10: R133.2@2420,1178.5 2421.5,1180 TP15.1@2600,1180
NetU2_10: U2.10 U2.13 | length 160.1
  Top Layer w10: U2.10@2585.67,2564.41 2544,2564.41 2544,2641.18 U2.13@2585.67,2641.18
UPDI: R100.1 R116.2 | length 2457.3
  Top Layer w10: R116.2@2270,2051.5 2270,2265 2345,2340 2536,2340 2657,2461 2787,2461 2861,2535 2861,2724 2872,2735 3578.5,2735 3736,2577.5 3736,2374 3783.5,2326.5 R100.1@3783.5,2190
pads on no net: B2.3 B3.3 B4.3 B5.3 B7.4 B7.5 B8.4 B8.5 B9.4 B9.5 B10.4 B10.5

## Polygon pours and split planes (outlines as drawn)
no net on Bottom Layer "NONET_L04_P000" (solid, pour order 0): 5600,0 5600,4000 0,4000 0,0
no net on Top Layer "NONET_L01_P001" (solid, pour order 1): 0,4000 5600,4000 5600,0 0,0
+5 on Plane(Power) (split plane): 5579.9,20.1 20.1,20.1 20.1,3979.9 5579.9,3979.9
GND on Plane(Gnd) (split plane): 5579.9,20.1 20.1,20.1 20.1,3979.9 5579.9,3979.9

## Silkscreen, mask and mechanical layers (free items; w line width, h text height)
Top Overlay:
  lines w10: 717,3483 1527,3483 1527,3583 717,3583 717,3483 ; 717.5,3595 2282.5,3595 2282.5,3695 717.5,3695 717.5,3595 ; 1541,3484 2283,3484 2283,3584 1541,3584 1541,3484 ; 2296,3596 3123,3596 3123,3696 2296,3696 2296,3596 ; 2296.5,3483 3124,3483 3124,3583 2296.5,3583 2296.5,3483 ; 3134,3596 4049,3596 4049,3696 3134,3696 3134,3596 ; 3136,3482 4051,3482 4051,3582 3136,3582 3136,3482 ; 4061,3596 4510,3596 4510,3696 4061,3696 4061,3596 ; 4062.5,3480 4507.5,3480 4507.5,3580 4062.5,3580 4062.5,3480
  text "ABS Data Systems, Inc, (c) Copyright 2023" at 1410,3829.99 h60
  text "CPU Bus and Control" at 1190,3630 h40
  text "Power" at 4190,3630 h40
  text "DAC Control" at 3348,3625 h40
  text "ADC Control" at 2504,3624 h40
  text "Int" at 1601,3510.5 h40
  text "SCLK" at 2323,3510 h40
  text "Din" at 2520,3510 h40
  text "DOut" at 2675,3510 h40
  text "CS1" at 2861,3510 h40
  text "CS0" at 2998,3510 h40
  text "SCLK" at 3170,3510 h40
  text "DIn" at 3350,3510 h40
  text "CS3" at 3485,3510 h40
  text "CS2" at 3635,3510 h40
  text "CS1" at 3785,3510 h40
  text "CS0" at 3920,3510 h40
  text "3.3V" at 4144,3510 h40
  text "5V" at 4365,3510 h40
  text "Rst" at 1741,3509 h40
  text "CS" at 1901,3509 h40
  text "RD" at 2056,3509 h40
  text "WR" at 2181,3509 h40
  text "D5" at 937,3508 h40
  text "D4" at 1037,3508 h40
  text "D3" at 1137,3508 h40
  text "D2" at 1237,3508 h40
  text "D1" at 1337,3508 h40
  text "D0" at 1437,3508 h40
  text "D7" at 742,3507 h40
  text "D6" at 842,3507 h40
  text "P/N DAC - 32958" at 4235,165 h60
Mechanical 1:
  the board outline again, w10

## Text inside footprints (layer, text, board x,y; h text height)
H3: Top Overlay "1" at 3993,2259 h40; Top Overlay "2" at 4101,2259 h40; Top Overlay "5" at 3998,1875 h40; Top Overlay "6" at 4103,1880 h40